# Allegro board B8.brd
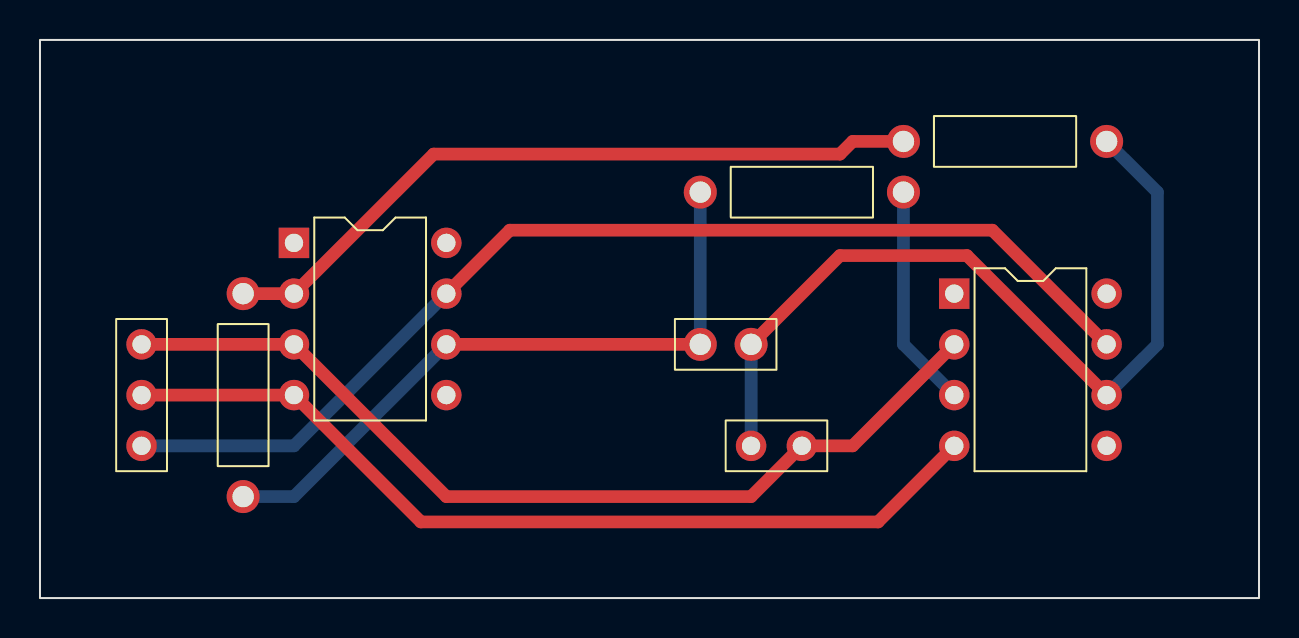
[diagram p0: board, top side]
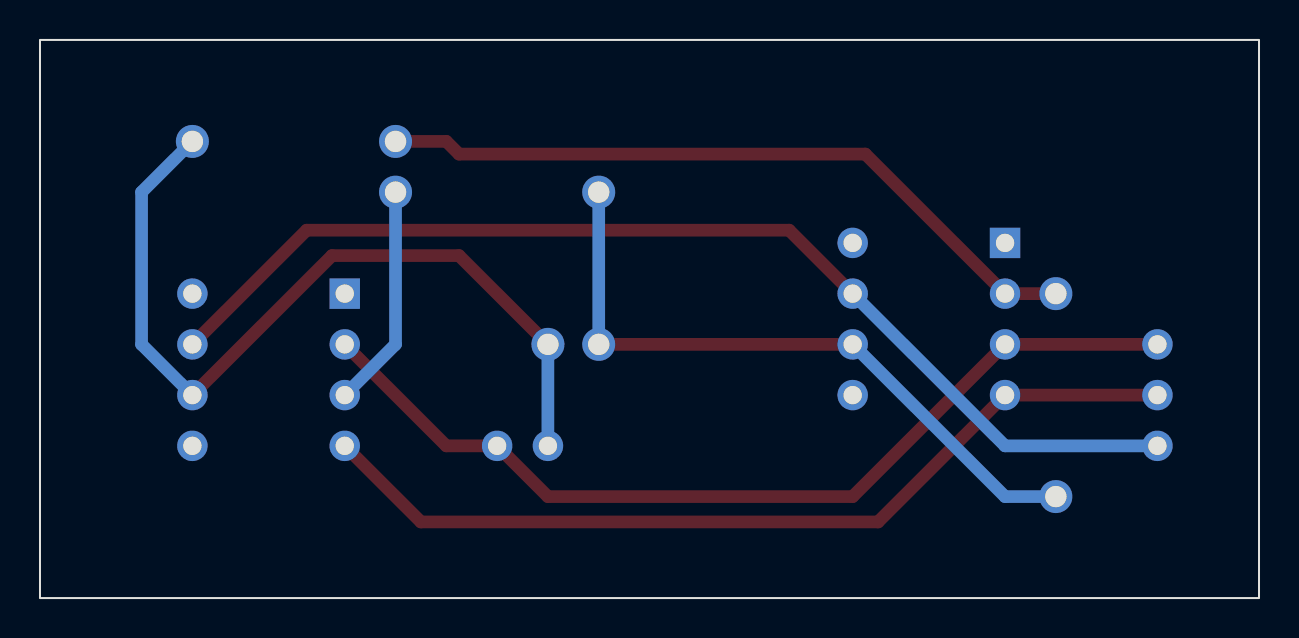
[diagram p1: board, bottom side, seen from below]

Outline 60.96 x 27.94 mm; copper layers: TOP, BOTTOM. Coordinates in mm from the lower left corner of the outline.
Outline path: rectangle 0,0 60.96,27.94

## Placement (name value [footprint] x y rotation side)
C1  0.01uF  [CAPCK05]  33.02 12.7 270 top
J1  CON2  [JUMPER2]  35.56 7.62 0 top
J2  CON3  [JUMPER3]  5.08 7.62 90 top
R1  2.7K  [RES400]  33.02 20.32 270 top
R2  10K  [RES400]  43.18 22.86 270 top
R3  20K  [RES400]  10.16 15.24 180 top
U1  LF356  [DIP8_3]  12.7 17.78 0 top
U2  LF356  [DIP8_3]  45.72 15.24 0 top

## Library data of the parts
C1 = CAP NP: Tolerance: ***; User Part Number: ***
J1 = CON2: User Part Number: ***
J2 = CON3: User Part Number: ***
R1-R3 = R: Tolerance: ***; User Part Number: ***
U1 U2 = LF356: Tolerance: ***; User Part Number: ***

## Footprints (pads in the part's own frame, mm; a bottom-side part is the same pattern mirrored in y, then rotated)
CAPCK05
  round 1.651 hole 1.067: 1(0,0) 2(0,2.54)
DIP8_3
  rect 1.524x1.524 hole 0.914: 1(0,0)
  round 1.524 hole 0.914: 2(0,-2.54) 3(0,-5.08) 4(0,-7.62) 5(7.62,-7.62) 6(7.62,-5.08) 7(7.62,-2.54) 8(7.62,0)
JUMPER2
  round 1.524 hole 0.914: 1(0,0) 2(2.54,0)
JUMPER3
  round 1.524 hole 0.914: 1(0,0) 2(2.54,0) 3(5.08,0)
RES400
  round 1.651 hole 1.067: 1(0,0) 2(0,10.16)

## Nets
+12V: J2.1 U1.7(V+) U2.7(V+)
-12V: J2.2 U1.4(V-) U2.4(V-)
GND: J1.2 J2.3 U1.3(+IN) U2.2(-IN)
N00276: R1.2 U2.3(+IN)
N00280: C1.1 R1.1 R3.2 U1.6(OUT)
N00387: C1.2 J1.1 R2.2 U2.6(OUT)
N00404: R2.1 R3.1 U1.2(-IN)

Pads without a net: U1 1 5 8; U2 1 5 8

## Routing (per net, layer and track width the routed paths; a pad name or vN(x,y) marks a point on that pad's centre or on a via; arc(x,y) is an arc through that point)
+12V: length 55.1
  TOP w0.635: U1.7 23.5,18.41 47.62,18.41 U2.7
  BOTTOM w0.635: J2.1 12.7,7.62 U1.7
-12V: length 44.8
  TOP w0.635: U2.4 41.91,3.81 19.05,3.81 U1.4 J2.2
GND: length 47
  TOP w0.635: U2.2 40.64,7.62 J1.2 35.56,5.08 20.32,5.08 U1.3 J2.3
N00276: length 11.2
  BOTTOM w0.635: U2.3 43.18,12.7 R1.2
N00280: length 33.6
  TOP w0.635: U1.6 C1.1
  BOTTOM w0.635: U1.6 12.7,5.08 R3.2 ; R1.1 C1.1
N00387: length 42.4
  TOP w0.635: C1.2 40.01,17.14 46.35,17.14 U2.6
  BOTTOM w0.635: U2.6 55.88,12.7 55.88,20.32 R2.2 ; C1.2 J1.1
N00404: length 36.2
  TOP w0.635: R2.1 40.64,22.86 40.01,22.23 19.68,22.23 U1.2 R3.1

## Text on the board
PAGE_OUTLINE: JangTaehee
